# Altium PCB PCB1.PcbDoc (part 2 of 2)
Units mm, origin at the board's own origin, x right, y up, seen from the top; angles counter-clockwise.
Board outline 53.34 x 94.59 mm, 4 copper layers (Top Layer, Signal Layer 1, Signal Layer 2, Bottom Layer), stack 0.778 mm thick; 130 components, 127 nets, 591 pads, 299 vias.
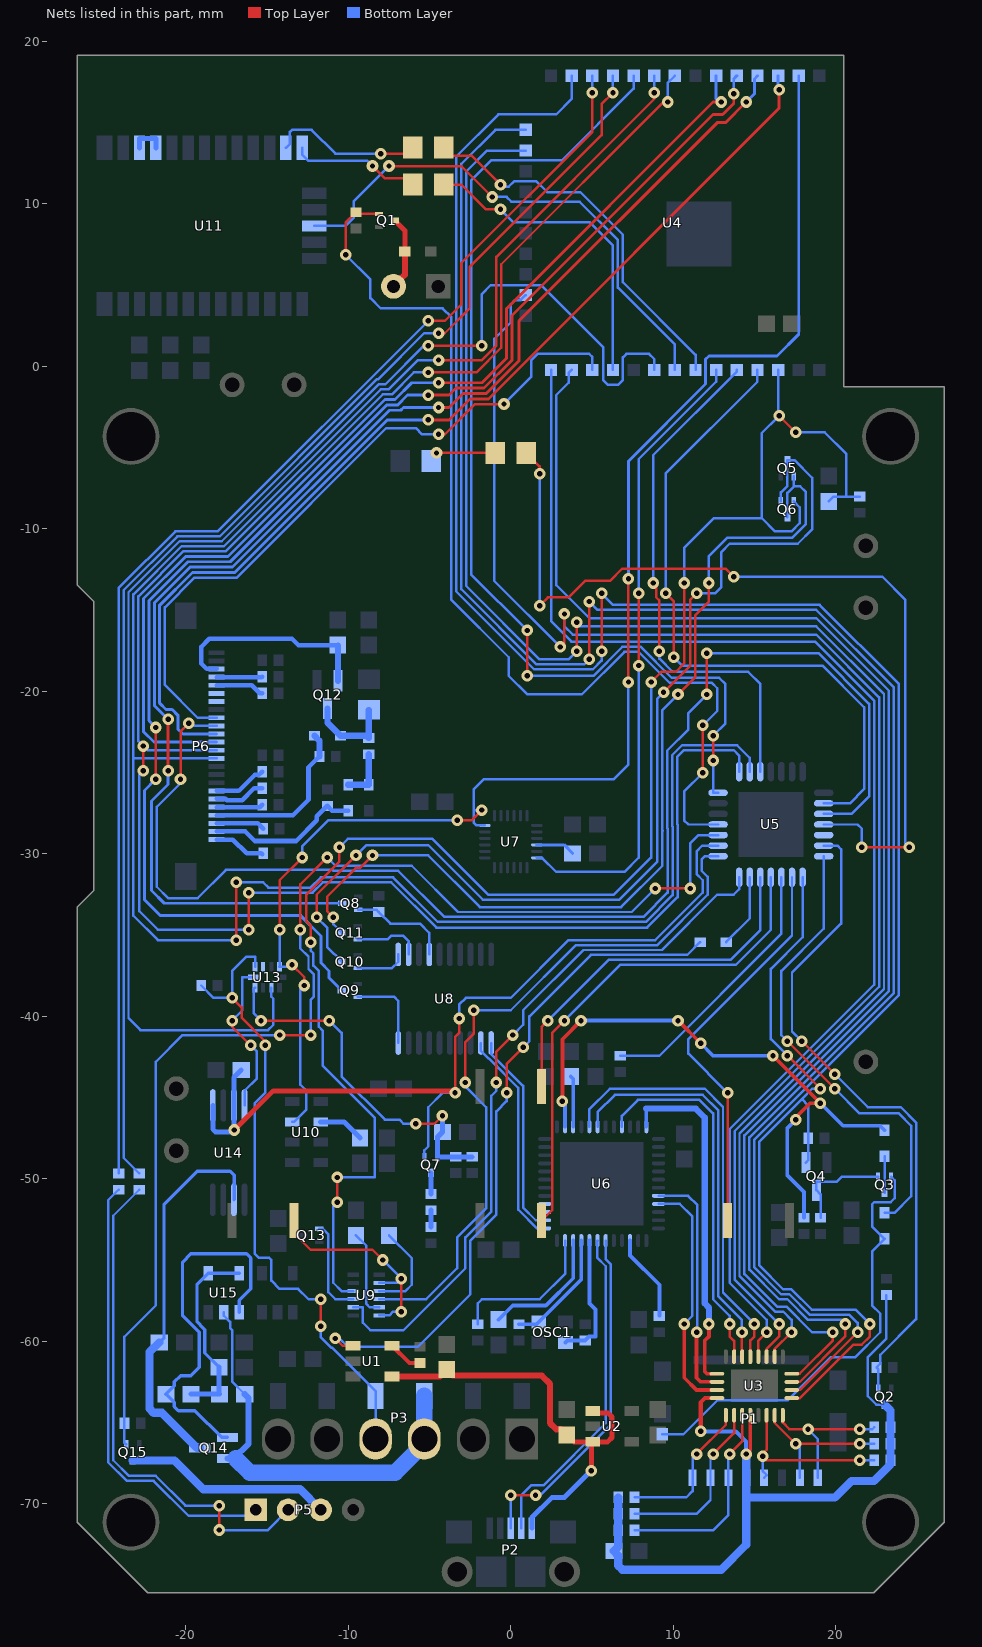
[diagram p4: the nets of this part, all layers, seen from the top]

## Via types
v1: diameter 0.711, hole 0.33, Top Layer to Bottom Layer, tented top, 297 vias
v2: diameter 1.524, hole 0.762, Top Layer to Bottom Layer, tented top, 1 vias
v3: diameter 1, hole 0.5, Top Layer to Bottom Layer, tented top, 1 vias

## Nets (pads, with @x,y where several pads share a name; then routed paths per layer and width w, separated by ;. In a path a pad name is that pad's centre, name@x,y a point inside that pad or via, vN(x,y) a via of type N, cw(c..) or ccw(c..) an arc to the next point about the centre after c; other vN are vias at no path point) (continued)
I2C_SDA: U4.37 U7.24 U10.7 U13.9 | length 94.1
  Top Layer w0.152: v1(-14.224,-34.671) -14.224,-31.623 v1(-12.827,-30.226) ; v1(-13.462,-36.83) -12.7,-37.592 v1(-12.7,-38.1) ; v1(-3.302,-27.94) -2.413,-27.94 v1(-1.778,-27.305) ; v1(7.239,-19.431) v1(7.239,-13.081)
  Bottom Layer w0.152: v1(-14.224,-34.671) -14.224,-36.945 U13.9@-14.236,-36.957 -13.589,-36.957 v1(-13.462,-36.83) ; U10.7@-13.448,-46.492 -13.345,-46.492 -12.573,-45.72 -12.573,-44.577 -12.954,-44.196 -12.954,-38.354 v1(-12.7,-38.1) ; v1(-12.827,-30.226) -12.827,-29.527 -11.24,-27.94 v1(-3.302,-27.94) ; v1(-1.778,-27.305) -2.286,-27.305 ; U7.24@-1.6,-28.25 -2.103,-28.25 -2.286,-28.067 -2.286,-27.305 ; v1(7.239,-19.431) 7.239,-24.511 6.35,-25.4 -1.651,-25.4 -2.286,-26.035 -2.286,-27.305
  Bottom Layer w0.178: v1(7.239,-13.081) 7.239,-5.842 11.988,-1.093 11.988,0.431 12.192,0.635 16.383,0.635 17.716,1.968 U4.37@17.716,17.872
KEEP_ALIVE: U5.1 U9.4 | length 43.7
  Top Layer w0.152: v1(-2.794,-44.069) -2.794,-41.589 -2.286,-41.081 v1(-2.286,-39.624)
  Bottom Layer w0.152: U9.4@-8.09,-57.4 -5.203,-57.4 -3.302,-55.499 -3.302,-53.594 -1.524,-51.816 -1.524,-45.593 -2.794,-44.323 v1(-2.794,-44.069) ; v1(-2.286,-39.624) 0,-39.624 4.013,-35.611 9.016,-35.611 12.116,-32.511 12.116,-31.42 11.735,-31.039 11.735,-30.353 11.944,-30.144 U5.1@12.752,-30.144
MOSI: P6.11 U4.30 U5.9 | length 128.7
  Top Layer w0.152: v1(-16.891,-35.306) v1(-16.891,-31.75) ; v1(-4.445,0.381) -1.778,0.381 -0.889,1.27 -0.889,6.731 8.826,16.446 v1(8.826,16.828)
  Bottom Layer w0.152: P6.11@-18.102,-24.124 -18.108,-24.13 -23.216,-24.13 ; v1(-16.891,-35.306) -21.717,-35.306 -23.216,-33.807 -23.216,-24.13 ; v1(-16.891,-31.75) -15.24,-31.75 -14.91,-32.08 -12.319,-32.08 -11.684,-31.445 -7.24,-31.445 -4.497,-34.188 8.307,-34.188 9.957,-32.538 9.957,-28.322 9.931,-28.297 9.931,-23.928 10.542,-23.317 13.919,-23.317 14.702,-24.1 U5.9@14.702,-24.944 ; v1(-4.445,0.381) -5.715,0.381 -7.518,-1.422 -8.003,-1.422 -17.655,-11.074 -20.256,-11.074 -23.216,-14.034 -23.216,-24.13 ; U4.30@8.826,17.872 v1(8.826,16.828) v1@8.89,16.764
NetC6_1: C6.1 Q6.S R10.2 U4.3 U9.10 | length 104.6
  Top Layer w0.152: v1(-12.319,-35.433) -12.319,-34.417 -12.573,-34.163 -12.573,-32.512 -10.541,-30.48 v1(-10.541,-29.591) ; v1(-10.668,-51.435) v1(-10.668,-49.911) ; v1(8.636,-19.431) 9.271,-18.796 10.16,-18.796 10.668,-18.288 v1(10.668,-13.335) ; v1(16.51,-3.048) v1(17.526,-4.064)
  Bottom Layer w0.152: v1(-12.319,-35.433) -12.319,-35.941 -12.141,-36.119 -12.141,-36.881 -11.811,-37.211 -11.811,-40.64 -11.557,-40.894 -11.557,-43.053 -8.382,-46.228 -8.382,-49.911 v1(-10.668,-49.911) ; v1(-10.668,-51.435) -10.922,-51.689 -10.922,-56.388 -10.41,-56.9 U9.10@-9.69,-56.9 ; v1(-10.541,-29.591) -10.033,-29.083 -4.826,-29.083 -1.397,-32.512 6.35,-32.512 8.636,-30.226 v1(8.636,-19.431) ; v1(10.668,-13.335) 10.668,-11.176 12.497,-9.347 15.443,-9.347 ; U4.3@16.446,-0.228 16.446,-3.112 15.443,-4.115 15.443,-9.347 ; Q6.S@17.418,-8.32 17.78,-8.682 17.78,-9.652 17.272,-10.16 16.256,-10.16 15.443,-9.347 ; v1(17.526,-4.064) 19.304,-4.064 20.648,-5.408 20.648,-8.04 ; C6.1@19.558,-8.315 19.833,-8.04 20.648,-8.04 ; R10.2@21.463,-8.04 20.648,-8.04
NetC9_1: C9.1 P1.4 Q2.D R6.1 R7.1 R8.1 R9.2 R15.1 R16.1 R17.1 U3.2 U3.6 | length 49.3
  Top Layer w0.229: v1(14.478,-66.929) 14.736,-66.671 U3.6@14.736,-64.538
  Top Layer w0.254: v1(11.684,-65.532) 11.684,-63.754 11.95,-63.488 U3.2@12.686,-63.488
  Bottom Layer w0.152: Q2.D@23,-63.89 22.488,-63.89 21.971,-63.373 21.971,-60.96 23.114,-59.817 R9.2@23.114,-57.142
  Bottom Layer w0.254: v1(11.684,-65.532) 13.843,-65.532 14.478,-66.167 v1(14.478,-66.929)
  Bottom Layer w0.508: R17.1@6.612,-69.596 R16.1@6.612,-70.612 R15.1@6.612,-71.628 6.612,-72.623 C9.1@6.337,-72.898 6.604,-73.165 6.604,-73.787 6.858,-74.041 12.954,-74.041 14.487,-72.508 14.487,-69.596 ; v1(14.478,-66.929) 14.487,-66.92 P1.4@14.487,-68.388 14.487,-69.596 ; Q2.D@23,-63.89 23.36,-64.25 R8.1@23.36,-65.278 R7.1@23.36,-66.294 R6.1@23.36,-67.31 23.36,-67.572 22.352,-68.58 20.955,-68.58 19.939,-69.596 14.487,-69.596
NetC11_1: C11.1 U7.10 | length 2.4
  Bottom Layer w0.203: U7.10@1.6,-29.45 3.275,-29.45 C11.1@3.797,-29.972
NetC14_1: C14.1 OSC1.3 U6.44 | length 8
  Bottom Layer w0.229: OSC1.3@3.365,-60.061 3.49,-59.936 C14.1@4.572,-59.936 4.818,-59.69 5.207,-59.69 5.207,-58.039 4.838,-57.67 U6.44@4.838,-53.792
NetC15_1: C15.1 U6.15 | length 3.2
  Bottom Layer w0.229: C15.1@3.683,-43.701 3.838,-43.856 U6.15@3.838,-46.792
NetC17_2: C17.2 OSC1.1 U6.45 | length 7.4
  Bottom Layer w0.229: C17.2@0.508,-58.936 1.59,-58.936 OSC1.1@1.715,-58.811 4.338,-56.188 U6.45@4.338,-53.792
NetC19_1: C19.1 U6.46 | length 8
  Bottom Layer w0.229: C19.1@-0.762,-58.661 0.114,-57.785 2.159,-57.785 3.838,-56.106 U6.46@3.838,-53.792
NetC20_2: C20.2 Q7.S R20.2 R21.2 U13.4 | length 22.6
  Top Layer w0.152: v1(-15.367,-40.259) v1(-11.176,-40.259) ; v1(-5.842,-46.609) -4.699,-46.609 v1(-4.204,-46.114)
  Bottom Layer w0.152: U13.4@-15.736,-38.227 -15.824,-38.315 -15.824,-39.802 v1(-15.367,-40.259) ; v1(-11.176,-40.259) -10.414,-41.021 -10.414,-43.688 -7.747,-46.355 -6.858,-46.355 -6.604,-46.609 v1(-5.842,-46.609)
  Bottom Layer w0.305: v1(-4.204,-46.114) C20.2@-4.204,-47.117 -4.512,-47.425 Q7.S@-4.512,-48.654 -4.502,-48.644 R21.2@-3.388,-48.644 R20.2@-2.372,-48.644
NetC23_2: C23.2 U9.3 | length 5.8
  Bottom Layer w0.152: U9.3@-8.09,-56.9 -6.481,-56.9 -6.096,-56.515 -6.096,-54.877 C23.2@-7.493,-53.48
NetC26_1: C26.1 D8.A L1.2 Q12.D | length 5.5
  Bottom Layer w0.381: Q12.D@-11.277,-21.049 -11.277,-21.939 D8.A@-10.477,-22.739 -8.872,-22.739 C26.1@-8.737,-22.874 L1.2@-8.737,-21.149
NetC26_2: C26.2 D6.A D7.K | length 3.1
  Bottom Layer w0.381: D7.K@-10.007,-25.749 D6.A@-8.737,-25.749 C26.2@-8.737,-23.874
NetC27_1: C27.1 U10.2 | length 2.8
  Bottom Layer w0.305: U10.2@-11.698,-46.492 -10.264,-46.492 C27.1@-9.271,-47.485
NetC28_2: C28.2 U9.5 | length 5.4
  Bottom Layer w0.152: C28.2@-9.525,-53.48 -8.89,-54.115 -8.89,-57.685 -8.675,-57.9 U9.5@-8.09,-57.9
NetC41_1: C41.1 P3.4 Q14.S U15.2 | length 26.1
  Bottom Layer w0.152: U15.2@-17.66,-58.196 -17.66,-58.413 -17.272,-58.801 -17.272,-59.182 -17.152,-59.302 -17.152,-62.464 C41.1@-16.37,-63.246
  Bottom Layer w0.381: Q14.S@-17.438,-67.198 -17.033,-67.198 -16.129,-66.294 -16.129,-63.487 C41.1@-16.37,-63.246
  Bottom Layer w1.016: Q14.S@-16.93,-67.198 -16.056,-68.072 -7.112,-68.072 -5.32,-66.28 P3.4@-5.32,-66.005 P3.4@-5.32,-63.355
NetC41_2: C41.2 R28.2 R30.1 U15.4 U15.5 | length 12
  Bottom Layer w0.203: R28.2@-17.948,-61.584 -18.821,-60.711 -18.821,-59.289 -18.923,-59.187 -18.923,-59.182 -19.304,-58.801 -19.304,-56.49 U15.4@-18.61,-55.796 U15.5@-16.71,-55.796
  Bottom Layer w0.305: R30.1@-19.672,-63.246 C41.2@-17.92,-63.246 -17.948,-63.218 R28.2@-17.948,-61.584
NetC43_2: C43.2 Q7.G U5.2 U14.5 U14.7 | length 54.1
  Top Layer w0.152: v1(-3.429,-44.704) -3.429,-41.275 -3.175,-41.021 v1(-3.175,-40.132)
  Top Layer w0.305: v1(-17.018,-46.99) -14.61,-44.582 -3.551,-44.582 v1(-3.429,-44.704)
  Bottom Layer w0.152: Q7.G@-5.312,-48.654 -5.312,-48.238 -5.08,-48.006 -5.08,-45.593 -4.191,-44.704 v1(-3.429,-44.704) ; v1(-3.175,-40.132) -3.175,-39.277 -2.76,-38.862 0,-38.862 3.556,-35.306 8.89,-35.306 11.811,-32.385 11.811,-31.623 11.43,-31.242 11.43,-29.845 11.781,-29.494 U5.2@12.752,-29.494
  Bottom Layer w0.305: U14.5@-18.333,-45.482 -18.333,-46.945 -18.161,-47.117 -17.145,-47.117 v1(-17.018,-46.99) -17.018,-45.497 U14.7@-17.033,-45.482 -17.033,-43.752 C43.2@-16.583,-43.302
NetD1_A: D1.A P4.2 Q1.D | length 4.6
  Top Layer w0.305: Q1.D@-7.13,8.97 -6.515,8.355 D1.A@-6.515,7.065
  Top Layer w0.381: P4.2@-7.215,4.915 -6.515,5.615 D1.A@-6.515,7.065
NetD2_A: D2.A U5.18 | length 55.9
  Top Layer w0.152: D2.A@0.95,-5.334 1.778,-6.162 v1(1.778,-6.604) ; v1(1.778,-14.732) 2.286,-14.224 3.556,-14.224 4.572,-13.208 6.096,-13.208 6.858,-12.446 13.208,-12.446 v1(13.716,-12.954) ; v1(21.59,-29.591) v1(24.511,-29.591)
  Bottom Layer w0.152: v1(1.778,-14.732) v1(1.778,-6.604) ; v1(13.716,-12.954) 22.86,-12.954 24.257,-14.351 24.257,-29.337 v1(24.511,-29.591) ; U5.18@19.252,-28.194 21.336,-28.194 21.59,-28.448 v1(21.59,-29.591) v1@21.493,-29.494
NetD2_K: D2.K R22.2 | length 3.6
  Top Layer w0.152: v1(-4.572,-5.334) D2.K@-0.95,-5.334
NetD3_A: D3.A U5.21 | length 28.8
  Top Layer w0.152: v1(17.018,-41.529) v1(19.939,-44.45)
  Bottom Layer w0.152: v1(17.018,-41.529) 16.652,-41.163 16.652,-37.196 19.252,-34.596 U5.21@19.252,-30.144 ; v1(19.939,-44.45) 21.463,-45.974 23.876,-45.974 24.638,-46.736 24.638,-51.054 23.6,-52.092 D3.A@22.995,-52.092
NetD4_A: D4.A R13.2 U6.14 | length 37.2
  Top Layer w0.229: v1(3.175,-45.212) 3.175,-41.402 v1(4.318,-40.259) ; v1(10.287,-40.259) v1(11.684,-41.656) ; v1(16.129,-42.418) v1(19.05,-45.339) 18.415,-45.339 17.526,-46.228 v1(17.526,-46.355)
  Bottom Layer w0.229: v1(3.175,-45.212) 3.338,-45.375 U6.14@3.338,-46.792 ; v1(4.318,-40.259) v1(10.287,-40.259) ; v1(11.684,-41.656) 12.446,-42.418 v1(16.129,-42.418) ; v1(17.526,-46.355) 17.018,-46.863 17.018,-49.784 18.042,-50.808 R13.2@18.042,-52.392 ; v1(19.05,-45.339) 20.447,-46.736 22.719,-46.736 D4.A@22.995,-47.012
NetD4_K: D4.K Q3.D | length 2.2
  Bottom Layer w0.152: Q3.D@22.995,-50.842 D4.K@22.995,-48.612
NetD5_A: D5.A U5.27 | length 4.6
  Bottom Layer w0.152: D5.A@13.246,-35.433 14.702,-33.977 U5.27@14.702,-31.444
NetD5_K: D5.K U1.1 | length 42.1
  Top Layer w0.152: v1(-10.795,-59.817) -10.348,-60.264 U1.1@-9.709,-60.264 ; v1(-0.254,-44.704) -0.254,-42.926 v1(0.762,-41.91)
  Bottom Layer w0.152: v1(-10.795,-59.817) -10.541,-59.817 -10.033,-60.325 -5.715,-60.325 -2.489,-57.099 -2.489,-53.797 -0.889,-52.197 -0.889,-45.847 -0.254,-45.212 v1(-0.254,-44.704) ; v1(0.762,-41.91) 1.143,-41.529 1.143,-40.005 4.928,-36.22 10.859,-36.22 D5.K@11.646,-35.433
NetP1_1: P1.1 R17.2 U3.3 | length 9.3
  Top Layer w0.152: v1(11.43,-66.929) 13.236,-65.123 U3.3@13.236,-64.538
  Bottom Layer w0.152: R17.2@7.612,-69.596 10.795,-69.596 11.187,-69.204 P1.1@11.187,-68.388 11.187,-67.172 v1(11.43,-66.929)
NetP1_2: P1.2 R16.2 U3.4 | length 10.8
  Top Layer w0.152: v1(12.446,-66.929) 13.736,-65.639 U3.4@13.736,-64.538
  Bottom Layer w0.152: R16.2@7.612,-70.612 11.43,-70.612 12.287,-69.755 P1.2@12.287,-68.388 12.287,-67.088 v1(12.446,-66.929)
NetP1_3: P1.3 R15.2 U3.5 | length 12.7
  Top Layer w0.152: v1(13.462,-66.929) 14.236,-66.155 U3.5@14.236,-64.538
  Bottom Layer w0.152: R15.2@7.612,-71.628 12.446,-71.628 13.387,-70.687 P1.3@13.387,-68.388 13.387,-67.004 v1(13.462,-66.929)
NetP1_5: P1.5 R6.2 U3.8 | length 11.1
  Top Layer w0.152: U3.8@15.736,-64.538 15.736,-66.663 15.494,-66.905 v1(15.494,-67.056) 15.748,-67.31 v1(21.463,-67.31)
  Bottom Layer w0.152: v1(15.494,-67.056) 15.494,-67.972 15.748,-68.226 P1.5@15.587,-68.388 ; v1(21.463,-67.31) R6.2@22.36,-67.31
NetP1_7: P1.7 R7.2 U3.9 | length 9.3
  Top Layer w0.152: U3.9@16.236,-64.538 16.236,-65.004 v1(17.526,-66.294) v1(21.463,-66.294)
  Bottom Layer w0.152: v1(17.526,-66.294) 17.787,-66.555 P1.7@17.787,-68.388 ; v1(21.463,-66.294) R7.2@22.36,-66.294
NetP1_8: P1.8 R8.2 U3.10 | length 9.5
  Top Layer w0.152: U3.10@16.736,-64.538 16.736,-64.996 17.145,-65.405 v1(18.288,-65.405) v1(21.463,-65.405)
  Bottom Layer w0.152: v1(18.288,-65.405) 18.887,-66.004 P1.8@18.887,-68.388 ; v1(21.463,-65.405) 22.233,-65.405 R8.2@22.36,-65.278
NetP2_2: P2.2 U6.43 | length 20.5
  Bottom Layer w0.152: P2.2@0.65,-71.493 0.65,-69.454 1.27,-68.834 2.032,-68.834 5.842,-65.024 5.842,-55.372 5.334,-54.864 5.334,-53.796 U6.43@5.338,-53.792
NetP2_3: P2.3 U6.42 | length 21.5
  Top Layer w0.152: v1(0,-69.469) v1(1.524,-69.469)
  Bottom Layer w0.152: P2.3@0,-71.493 v1(0,-69.469) ; v1(1.524,-69.469) 1.728,-69.469 1.778,-69.519 6.147,-65.15 6.147,-55.246 5.838,-54.937 U6.42@5.838,-53.792
NetP3_3: P3.3 R29.1 U13.6 | length 39.1
  Top Layer w0.152: v1(-17.145,-38.862) -16.561,-39.446 -16.561,-40.081 -15.113,-41.529 v1(-15.113,-41.783) ; v1(-11.684,-59.055) v1(-11.684,-57.404)
  Bottom Layer w0.152: R29.1@-19.042,-38.1 -18.28,-38.862 v1(-17.145,-38.862) -17.145,-37.211 -16.256,-36.322 -15.748,-36.322 -15.736,-36.334 U13.6@-15.736,-36.957 ; v1(-15.113,-41.783) -15.113,-44.704 -15.748,-45.339 -15.748,-54.61 -15.494,-54.864 -14.859,-54.864 -14.732,-54.991 -14.732,-56.261 -14.224,-56.769 -13.081,-56.769 -12.446,-57.404 v1(-11.684,-57.404) ; v1(-11.684,-59.055) -11.684,-59.754 -11.037,-60.401 -10.973,-60.401 -8.32,-63.054 P3.3@-8.32,-63.355 P3.3@-8.32,-66.005
NetP5_1: P5.1 R34.1 | length 27.6
  Bottom Layer w0.152: R34.1@-24.13,-50.665 -24.765,-51.3 -24.765,-67.437 -23.622,-68.58 -21.971,-68.58 -19.812,-70.739 -16.081,-70.739 P5.1@-15.7,-70.358
NetP5_2: P5.2 R32.1 | length 31.2
  Top Layer w0.152: v1(-17.932,-71.603) v1(-17.932,-70.104)
  Bottom Layer w0.152: R32.1@-22.86,-50.665 -24.46,-52.265 -24.46,-67.31 -23.495,-68.275 -21.845,-68.275 -20.016,-70.104 v1(-17.932,-70.104) ; v1(-17.932,-71.603) -14.945,-71.603 P5.2@-13.7,-70.358
NetP5_3: P5.3 Q15.D | length 12.8
  Bottom Layer w0.508: Q15.D@-23.271,-67.318 -20.693,-67.318 -18.923,-69.088 -12.97,-69.088 P5.3@-11.7,-70.358
NetP6_13: P6.13 U4.33 | length 64.8
  Top Layer w0.178: v1(-4.445,-1.016) -1.778,-1.016 -0.254,0.508 -0.254,3.556 12.446,16.256 v1(12.954,16.256)
  Bottom Layer w0.178: P6.13@-18.102,-23.124 -21.961,-23.124 -22.593,-22.492 -22.593,-14.292 -19.998,-11.697 -17.397,-11.697 -7.745,-2.045 -7.125,-2.045 -6.096,-1.016 v1(-4.445,-1.016) ; U4.33@12.636,17.872 12.636,16.446 12.826,16.256 v1(12.954,16.256)
NetP6_14: P6.14 U4.36 | length 63.6
  Top Layer w0.178: v1(-5.08,-3.302) -3.81,-3.302 -2.515,-2.007 -1.368,-2.007 16.51,15.871 v1(16.51,17.018)
  Bottom Layer w0.178: P6.14@-18.102,-22.624 -20.175,-22.624 -20.485,-22.314 -20.485,-21.47 -20.835,-21.12 -21.212,-21.12 -21.603,-20.729 -21.603,-14.702 -19.588,-12.687 -16.987,-12.687 -7.602,-3.302 v1(-5.08,-3.302) ; U4.36@16.446,17.872 16.446,17.082 v1(16.51,17.018)
NetP6_15: P6.15 U5.17 | length 82.9
  Top Layer w0.152: v1(-20.32,-25.4) -20.32,-22.479 v1(-19.812,-21.971) ; v1(12.065,-20.193) v1(12.065,-17.653)
  Bottom Layer w0.152: v1(-20.32,-25.4) -20.32,-25.654 -21.781,-27.114 -21.781,-32.023 -21.082,-32.721 -19.259,-32.721 -17.526,-30.988 -10.972,-30.988 -10.921,-31.039 -6.934,-31.039 -4.089,-33.884 8.153,-33.884 9.652,-32.385 9.652,-28.449 9.627,-28.423 9.627,-23.647 10.922,-22.352 10.922,-21.336 v1(12.065,-20.193) ; v1(-19.812,-21.971) -19.659,-22.124 P6.15@-18.102,-22.124 ; v1(12.065,-17.653) 18.923,-17.653 22.047,-20.777 22.047,-26.467 20.97,-27.544 U5.17@19.252,-27.544
NetP6_16: P6.16 U4.12 | length 43.3
  Top Layer w0.152: v1(-4.445,-4.191) -4.064,-4.191 -2.197,-2.324 v1(-0.419,-2.324)
  Bottom Layer w0.152: P6.16@-18.102,-21.624 -19.27,-21.624 -21.285,-19.609 -21.285,-14.834 -19.456,-13.005 -16.856,-13.005 -7.661,-3.81 -5.842,-3.81 -5.461,-4.191 v1(-4.445,-4.191) ; v1(-0.419,-2.324) 1.27,-0.635 1.27,0.381 1.651,0.762 4.826,0.762 5.016,0.572 U4.12@5.016,-0.228
NetQ1_G: Q1.G R1.1 U5.4 | length 63.1
  Top Layer w0.152: v1(-10.16,6.858) -10.16,8.835 R1.1@-9.525,9.47 -9.425,9.37 Q1.G@-8.11,9.37 ; v1(11.811,-25.019) v1(11.811,-22.098)
  Bottom Layer w0.152: v1(-10.16,6.858) -8.636,5.334 -8.636,4.191 -8.001,3.556 -4.191,3.556 -3.658,3.023 -3.658,-14.376 -0.127,-17.907 -0.127,-19.05 1.016,-20.193 4.368,-20.193 6.984,-17.577 7.875,-17.577 9.78,-19.482 12.37,-19.482 12.7,-19.812 12.7,-21.209 v1(11.811,-22.098) ; v1(11.811,-25.019) 10.668,-26.162 10.668,-27.94 10.922,-28.194 U5.4@12.752,-28.194
NetQ2_G: Q2.G R5.2 U5.20 | length 41
  Top Layer w0.152: v1(17.907,-41.529) v1(19.939,-43.561)
  Bottom Layer w0.152: v1(17.907,-41.529) 17.302,-40.924 17.302,-37.308 20.32,-34.29 20.32,-29.718 20.096,-29.494 U5.20@19.252,-29.494 ; v1(19.939,-43.561) 21.971,-45.593 24.003,-45.593 24.943,-46.533 24.943,-58.623 22.733,-60.833 22.733,-61.367 R5.2@22.5,-61.6 22.6,-61.7 Q2.G@22.6,-62.91
NetQ3_G: Q3.G Q4.D R12.2 | length 6.2
  Bottom Layer w0.152: R12.2@19.058,-52.392 19.058,-50.948 Q4.D@18.804,-50.694 18.804,-50.165 20.066,-50.165 20.369,-49.862 Q3.G@22.595,-49.862
NetQ4_G: Q4.G R11.2 U3.11 U5.22 | length 47.4
  Top Layer w0.152: v1(17.018,-42.418) v1(19.05,-44.45) ; U3.11@17.286,-63.488 17.792,-63.488 21.082,-60.198 21.59,-60.198 22.098,-59.69 v1(22.098,-58.928)
  Bottom Layer w0.152: v1(17.018,-42.418) 16.002,-41.402 16.002,-37.084 17.952,-35.134 U5.22@17.952,-31.444 ; Q4.G@18.154,-48.994 18.296,-48.852 R11.2@18.296,-47.498 18.296,-45.474 17.907,-45.085 ; v1(19.05,-44.45) 18.542,-44.45 17.907,-45.085 ; v1(22.098,-58.928) 21.209,-58.039 18.515,-58.039 17.271,-56.794 16.763,-56.794 15.291,-55.323 15.291,-47.701 17.907,-45.085
NetQ5_D: Q5.D Q6.G Q10.D | length 64.7
  Top Layer w0.152: v1(-11.938,-33.909) -11.938,-32.512 v1(-9.525,-30.099) ; v1(9.398,-20.066) 11.049,-18.415 11.049,-14.351 v1(11.43,-13.97)
  Bottom Layer w0.152: v1(-11.938,-33.909) -11.303,-34.544 -11.303,-35.72 Q10.D@-10.396,-36.627 ; v1(-9.525,-30.099) -8.89,-29.464 -5.08,-29.464 -1.727,-32.817 6.68,-32.817 9.017,-30.48 9.017,-20.447 v1(9.398,-20.066) ; v1(11.43,-13.97) 12.573,-13.97 12.954,-13.589 12.954,-11.43 13.462,-10.922 17.653,-10.922 18.542,-10.033 18.542,-6.858 17.464,-5.78 Q5.D@17.018,-5.78 17.018,-7.366 16.618,-7.766 Q6.G@16.618,-8.32
NetQ5_G: Q5.G Q6.D Q11.D | length 59.2
  Top Layer w0.152: v1(-10.922,-33.909) -11.303,-33.528 -11.303,-32.639 -9.525,-30.861 -9.271,-30.861 v1(-8.509,-30.099) ; v1(10.287,-20.193) 11.354,-19.126 11.354,-15.316 12.192,-14.478 v1(12.192,-13.335)
  Bottom Layer w0.152: v1(-10.922,-33.909) -10.922,-34.323 Q11.D@-10.396,-34.849 ; v1(-8.509,-30.099) -5.08,-30.099 -1.905,-33.274 6.782,-33.274 9.322,-30.734 9.322,-28.6 ; 9.347,-28.575 9.322,-28.6 ; v1(10.287,-20.193) 9.322,-21.158 9.322,-28.6 ; v1(12.192,-13.335) 12.192,-11.684 13.335,-10.541 17.322,-10.541 18.161,-9.702 18.161,-7.747 17.811,-7.397 17.418,-7.397 ; Q6.D@17.018,-9.3 17.018,-7.797 17.418,-7.397 ; Q5.G@17.418,-6.76 17.418,-7.397
NetQ7_D: Q7.D R24.1 | length 1.3
  Bottom Layer w0.305: R24.1@-4.912,-50.922 Q7.D@-4.912,-49.634
NetQ8_D: Q8.D U4.35 | length 83
  Top Layer w0.178: v1(-21.082,-24.892) v1(-21.082,-21.717) ; v1(-4.445,-2.54) -3.81,-2.54 -2.946,-1.676 -1.504,-1.676 0.508,0.336 0.508,2.794 12.7,14.986 13.208,14.986 v1(14.478,16.256)
  Bottom Layer w0.178: v1(-21.082,-24.892) -21.082,-25.73 -22.098,-26.746 -22.098,-32.258 -21.317,-33.039 Q8.D@-10.378,-33.039 ; v1(-21.082,-21.717) -21.933,-20.866 -21.933,-14.566 -19.724,-12.357 -17.124,-12.357 -7.472,-2.705 -6.769,-2.705 -6.604,-2.54 v1(-4.445,-2.54) ; v1(14.478,16.256) 14.986,16.764 14.986,17.682 U4.35@15.176,17.872
NetQ8_S: Q8.S R25.2 U8.4 | length 6.3
  Bottom Layer w0.152: Q8.S@-9.398,-33.439 -8.26,-33.439 R25.2@-8.128,-33.571 -7.409,-34.29 -5.588,-34.29 -5.016,-34.861 U8.4@-5.016,-36.188
NetQ9_D: Q9.D U4.34 | length 86.6
  Top Layer w0.178: v1(-21.844,-25.4) v1(-21.844,-22.225) ; v1(-5.08,-1.778) -3.81,-1.778 -3.378,-1.346 -1.641,-1.346 0.076,0.371 0.076,3.124 12.446,15.494 13.036,15.494 13.716,16.174 v1(13.716,16.764)
  Bottom Layer w0.178: v1(-21.844,-25.4) -22.543,-26.098 -22.543,-32.829 -21.59,-33.782 -12.954,-33.782 -11.684,-35.052 -11.684,-36.703 -11.176,-37.211 -11.176,-37.625 Q9.D@-10.396,-38.405 ; v1(-21.844,-22.225) -22.263,-21.806 -22.263,-14.429 -19.861,-12.027 -17.261,-12.027 -7.609,-2.375 -6.947,-2.375 -6.35,-1.778 v1(-5.08,-1.778) ; v1(13.716,16.764) 13.716,17.682 U4.34@13.906,17.872
NetQ9_S: Q9.S U8.20 | length 5.2
  Bottom Layer w0.152: Q9.S@-9.416,-38.805 -9.397,-38.786 -7.188,-38.786 -6.921,-39.052 U8.20@-6.921,-41.638
NetQ10_S: Q10.S U8.1 | length 3.1
  Bottom Layer w0.152: Q10.S@-9.416,-37.027 -7.309,-37.027 -6.921,-36.639 U8.1@-6.921,-36.188
NetQ11_S: Q11.S U8.2 | length 4.2
  Bottom Layer w0.152: Q11.S@-9.416,-35.249 -7.563,-35.249 -7.366,-35.052 -6.604,-35.052 -6.286,-35.369 U8.2@-6.286,-36.188
NetQ13_G: Q13.G U9.9 | length 6
  Bottom Layer w0.152: Q13.G@-11.788,-53.062 -11.581,-53.062 -11.227,-53.416 -11.227,-56.972 -10.799,-57.4 U9.9@-9.69,-57.4
NetQ14_D: Q14.D R31.1 U14.2 | length 23.8
  Bottom Layer w0.203: R31.1@-21.629,-60.06 -21.336,-59.767 -21.336,-51.562 -19.304,-49.53 -17.272,-49.53 -17.018,-49.784 -17.018,-51.267 U14.2@-17.033,-51.282
  Bottom Layer w0.508: R31.1@-21.629,-60.06 -22.225,-60.656 -22.225,-64.135 -21.971,-64.389 -21.463,-64.389 -19.304,-66.548 Q14.D@-19.138,-66.548
NetQ14_G: Q14.G R30.2 U15.1 | length 22.9
  Bottom Layer w0.203: Q14.G@-17.438,-65.898 -17.795,-65.898 -19.431,-64.262 -20.447,-64.262 -20.701,-64.008 -20.701,-63.754 -21.209,-63.246 R30.2@-21.222,-63.246 -20.701,-62.725 -20.701,-62.484 -20.32,-62.103 -19.685,-62.103 -19.177,-61.595 -19.177,-59.436 -20.193,-58.42 -20.193,-55.118 -19.685,-54.61 -16.256,-54.61 -16.002,-54.864 -16.002,-56.769 -16.71,-57.477 U15.1@-16.71,-58.196
NetQ15_G: Q15.G R33.1 U5.3 | length 75.7
  Top Layer w0.152: v1(-14.224,-41.148) v1(-12.319,-41.148) ; v1(-12.954,-34.671) -12.954,-31.877 v1(-11.303,-30.226) ; v1(8.89,-32.131) v1(11.049,-32.131)
  Bottom Layer w0.152: Q15.G@-23.671,-66.338 -23.771,-66.238 R33.1@-23.771,-65.028 -23.771,-59.712 -21.844,-57.785 -21.844,-42.799 -20.193,-41.148 v1(-14.224,-41.148) ; v1(-12.954,-34.671) -12.954,-35.814 -12.446,-36.322 -12.446,-37.084 -12.116,-37.414 -12.116,-38.786 -12.319,-38.989 v1(-12.319,-41.148) ; v1(-11.303,-30.226) -10.795,-30.734 -6.096,-30.734 -3.251,-33.579 7.442,-33.579 v1(8.89,-32.131) ; v1(11.049,-32.131) 11.049,-29.337 11.542,-28.844 U5.3@12.752,-28.844
NetR2_1: R2.1 U4.11 | length 19.6
  Top Layer w0.152: R2.1@-4.13,11.176 -3.048,11.176 -1.524,9.652 v1(-0.635,9.652)
  Bottom Layer w0.152: v1(-0.635,9.652) 0.165,8.852 4.864,8.852 6.286,7.43 U4.11@6.286,-0.228
NetR2_2: R2.2 U11.26 | length 8
  Top Layer w0.152: v1(-8.509,12.319) -7.747,11.557 -6.411,11.557 R2.2@-6.03,11.176
  Bottom Layer w0.152: U11.26@-12.842,13.432 -12.842,13.033 -12.446,12.637 -8.827,12.637 v1(-8.509,12.319)
NetR3_1: R3.1 U4.7 | length 23.8
  Top Layer w0.152: R3.1@-4.13,13.462 -3.622,12.954 -2.413,12.954 v1(-0.635,11.176)
  Bottom Layer w0.152: v1@-0.687,11.049 -0.127,11.049 0.216,11.392 1.562,11.392 2.244,10.71 4.276,10.71 6.896,8.09 6.896,5.169 11.366,0.699 U4.7@11.366,-0.228 ; v1@-0.635,11.101 v1(-0.635,11.176)
NetR3_2: R3.2 U11.25 | length 9.5
  Top Layer w0.152: v1(-8.001,13.081) -6.411,13.081 R3.2@-6.03,13.462
  Bottom Layer w0.152: U11.25@-13.842,13.432 -13.589,13.685 -13.589,14.415 -13.462,14.542 -12.256,14.542 -10.795,13.081 v1(-8.001,13.081)
NetR4_1: R4.1 U1.5 | length 2.2
  Top Layer w0.254: U1.5@-7.309,-60.264 -6.24,-61.333 R4.1@-5.588,-61.333
NetR14_2: R14.2 U6.39 | length 5.4
  Bottom Layer w0.229: U6.39@7.338,-53.792 7.338,-54.709 9.144,-56.515 R14.2@9.144,-58.428
NetR18_1: R18.1 U5.24 | length 16.5
  Bottom Layer w0.152: R18.1@6.731,-42.426 9.136,-42.426 16.652,-34.91 U5.24@16.652,-31.444
NetR19_1: R19.1 U6.47 | length 9.5
  Bottom Layer w0.152: R19.1@-2.032,-58.936 -2.032,-57.658 -1.778,-57.404 1.778,-57.404 3.338,-55.844 U6.47@3.338,-53.792
NetR23_1: R23.1 R24.2 | length 1
  Bottom Layer w0.305: R23.1@-4.912,-52.954 R24.2@-4.912,-51.922
NetR32_2: R32.2 U4.28 | length 82.7
  Top Layer w0.152: v1(-4.445,2.032) -4.064,2.032 -2.54,3.556 -2.54,6.096 5.588,14.224 5.588,16.13 v1(6.286,16.828)
  Bottom Layer w0.152: R32.2@-22.86,-49.665 -23.825,-48.7 -23.825,-13.782 -20.508,-10.465 -17.908,-10.465 -8.256,-0.813 -8.179,-0.813 -5.334,2.032 v1(-4.445,2.032) ; v1(6.286,16.828) U4.28@6.286,17.872
NetR34_2: R34.2 U4.27 | length 81.7
  Top Layer w0.152: v1(-5.08,2.794) -4.064,2.794 -3.048,3.81 -3.048,6.35 5.016,14.414 v1(5.016,16.828)
  Bottom Layer w0.152: R34.2@-24.13,-49.665 -24.13,-13.656 -20.634,-10.16 -18.034,-10.16 v1(-5.08,2.794) ; v1(5.016,16.828) U4.27@5.016,17.872
NetSW1_2: SW1.2 U9.2 U9.6 | length 13.5
  Top Layer w0.152: SW1.2@-13.34,-52.57 -13.34,-53.335 -12.319,-54.356 -8.509,-54.356 v1(-7.874,-54.991) ; v1(-6.731,-58.166) v1(-6.731,-56.134)
  Bottom Layer w0.152: U9.6@-8.09,-58.4 -7.473,-58.4 -7.239,-58.166 v1(-6.731,-58.166) ; U9.2@-8.09,-56.4 -6.997,-56.4 v1(-6.731,-56.134) v1(-7.874,-54.991)
NetSW2_1: SW2.1 U5.25 | length 31.1
  Top Layer w0.152: SW2.1@1.9,-52.57 2.54,-51.93 2.54,-41.021 v1(3.302,-40.259)
  Bottom Layer w0.152: v1(3.302,-40.259) 6.731,-36.83 13.843,-36.83 16.002,-34.671 U5.25@16.002,-31.444
NetSW3_1: SW3.1 U5.26 | length 22.8
  Top Layer w0.152: SW3.1@1.9,-44.323 1.9,-40.645 v1(2.286,-40.259)
  Bottom Layer w0.152: v1(2.286,-40.259) 6.02,-36.525 13.513,-36.525 15.352,-34.686 U5.26@15.352,-31.444
NetSW4_1: SW4.1 U5.23 | length 24.8
  Top Layer w0.152: SW4.1@13.34,-52.57 v1(13.34,-44.709)
  Bottom Layer w0.152: v1(13.34,-44.709) 10.922,-42.291 10.922,-41.402 17.302,-35.022 U5.23@17.302,-31.444
NetU3_1: U3.1 U6.33 | length 14.9
  Top Layer w0.229: v1(10.668,-58.928) 10.668,-62.23 11.426,-62.988 U3.1@12.686,-62.988
  Bottom Layer w0.152: U6.33@9.088,-51.542 10.394,-51.542 11.176,-52.324 11.176,-58.42 v1(10.668,-58.928)
NetU3_12: U3.12 U4.26 | length 126.1
  Top Layer w0.152: v1(5.588,-17.526) v1(5.588,-13.97) ; U3.12@17.286,-62.988 17.784,-62.988 v1(21.336,-59.436)
  Bottom Layer w0.152: U4.26@3.746,17.872 3.746,16.446 2.794,15.494 -0.762,15.494 -3.353,12.903 -3.353,-13.855 1.436,-18.644 5.055,-18.644 5.588,-18.111 v1(5.588,-17.526) ; v1(5.588,-13.97) 6.299,-14.681 18.999,-14.681 23.876,-19.558 23.876,-38.685 14.986,-47.575 14.986,-55.449 16.636,-57.099 17.144,-57.099 18.414,-58.369 19.558,-58.369 19.583,-58.344 20.816,-58.344 21.336,-58.864 v1(21.336,-59.436)
NetU3_13: U3.13 U4.24 | length 117.4
  Top Layer w0.152: v1(4.826,-18.034) v1(4.826,-14.478) ; U3.13@17.286,-62.488 17.776,-62.488 20.574,-59.69 v1(20.574,-58.928)
  Bottom Layer w0.152: U4.24@0.916,14.542 -0.952,14.542 -3.048,12.446 -3.048,-13.716 1.575,-18.339 4.521,-18.339 v1(4.826,-18.034) ; v1(4.826,-14.478) 5.334,-14.986 18.796,-14.986 23.571,-19.761 23.571,-38.559 14.681,-47.449 14.681,-55.575 16.51,-57.404 17.018,-57.404 18.288,-58.674 20.32,-58.674 v1(20.574,-58.928)
NetU3_14: U3.14 U4.13 | length 87.2
  Top Layer w0.152: U3.14@17.286,-61.988 17.768,-61.988 19.812,-59.944 v1(19.812,-59.436)
  Bottom Layer w0.152: U4.13@3.746,-0.228 3.556,-0.418 3.556,-1.016 2.794,-1.778 2.794,-13.462 4.826,-15.494 18.796,-15.494 23.266,-19.964 23.266,-38.432 14.376,-47.322 14.376,-55.855 16.382,-57.861 16.967,-57.861 18.542,-59.436 v1(19.812,-59.436)
NetU3_16: U3.16 U4.23 | length 107.8
  Top Layer w0.152: v1(4.064,-17.526) 3.81,-17.526 4.064,-17.272 v1(4.064,-15.748) ; U3.16@16.236,-60.938 16.236,-60.472 v1(17.272,-59.436)
  Bottom Layer w0.152: U4.23@0.916,13.272 -1.46,13.272 -2.743,11.989 -2.743,-13.513 1.778,-18.034 3.556,-18.034 v1(4.064,-17.526) ; v1@4.064,-16.002 18.796,-16.002 22.962,-20.168 22.962,-38.306 14.072,-47.196 14.072,-55.982 16.256,-58.166 16.764,-58.166 17.272,-58.674 v1(17.272,-59.436)
NetU3_17: U3.17 U4.16 | length 94.1
  Top Layer w0.152: v1(3.048,-17.272) 3.302,-17.018 v1(3.302,-15.24) ; U3.17@15.736,-60.938 15.736,-60.464 16.51,-59.69 v1(16.51,-58.928)
  Bottom Layer w0.152: U4.16@0.916,4.382 0.598,4.064 0.254,4.064 0,3.81 0,2.694 -1.016,1.678 -1.016,-13.208 v1(3.048,-17.272) ; v1(3.302,-15.24) 3.302,-16.002 3.81,-16.51 18.796,-16.51 22.657,-20.371 22.657,-38.18 13.767,-47.07 13.767,-56.185 v1(16.51,-58.928)
NetU3_18: U3.18 U4.14 | length 82.6
  Top Layer w0.152: U3.18@15.236,-60.938 15.236,-59.948 v1(15.748,-59.436)
  Bottom Layer w0.152: U4.14@2.476,-0.228 2.476,-15.684 3.734,-16.942 18.72,-16.942 22.352,-20.574 22.352,-38.054 13.462,-46.944 13.462,-56.388 15.748,-58.674 v1(15.748,-59.436)
NetU3_19: U3.19 U6.17 | length 26.6
  Top Layer w0.152: U3.19@14.736,-60.938 14.736,-59.94 14.986,-59.69 v1(14.986,-58.928)
  Bottom Layer w0.152: U6.17@4.838,-46.792 4.838,-45.708 6.096,-44.45 11.938,-44.45 13.056,-45.568 13.056,-56.998 v1(14.986,-58.928)
NetU3_20: U3.20 U6.18 | length 24.9
  Top Layer w0.152: v1(14.224,-59.436) 14.224,-60.926 U3.20@14.236,-60.938
  Bottom Layer w0.152: U6.18@5.338,-46.792 5.338,-45.893 6.401,-44.83 11.81,-44.83 12.751,-45.771 12.751,-57.201 14.224,-58.674 v1(14.224,-59.436)
NetU3_21: U3.21 U6.21 | length 22.5
  Top Layer w0.152: v1(13.462,-58.928) 13.462,-59.69 13.736,-59.964 U3.21@13.736,-60.938
  Bottom Layer w0.152: U6.21@6.838,-46.792 6.838,-46.121 7.824,-45.135 11.607,-45.135 12.446,-45.974 12.446,-57.404 13.462,-58.42 v1(13.462,-58.928)
NetU3_23: U3.23 U6.24 | length 21.6
  Top Layer w0.229: v1(12.192,-58.928) 12.192,-59.69 11.938,-59.944 11.938,-61.849 12.077,-61.988 U3.23@12.686,-61.988
  Bottom Layer w0.229: U6.24@8.338,-46.792 8.338,-45.676
  Bottom Layer w0.381: 8.338,-45.676 11.386,-45.676 11.938,-46.228 11.938,-57.658 12.192,-57.912 v1(12.192,-58.928)
NetU3_24: U3.24 U6.32 | length 14.6
  Top Layer w0.229: v1(11.43,-59.436) 11.43,-62.23 11.688,-62.488 U3.24@12.686,-62.488
  Bottom Layer w0.152: U6.32@9.088,-51.042 10.91,-51.042 11.481,-51.613 11.481,-59.385 v1(11.43,-59.436)
NetU4_4: U4.4 U5.16 | length 41.1
  Top Layer w0.152: v1(9.525,-13.97) 10.033,-14.478 v1(10.033,-17.907)
  Bottom Layer w0.152: v1(9.525,-13.97) 9.525,-6.604 15.176,-0.953 U4.4@15.176,-0.228 ; v1(10.033,-17.907) 10.541,-18.415 19.177,-18.415 21.742,-20.98 21.742,-26.01 20.858,-26.894 U5.16@19.252,-26.894
NetU4_5: U4.5 U5.10 | length 32.3
  Top Layer w0.152: v1(8.763,-13.335) 8.941,-13.513 8.941,-14.212 9.144,-14.415 v1(9.144,-17.526)
  Bottom Layer w0.152: v1(8.763,-13.335) 8.763,-5.461 13.906,-0.318 U4.5@13.906,-0.228 ; v1(9.144,-17.526) 9.144,-17.984 9.956,-18.796 14.605,-18.796 15.352,-19.543 U5.10@15.352,-24.944
NetU4_6: U4.6 U7.12 | length 39
  Top Layer w0.152: v1(7.874,-18.415) v1(7.874,-13.97)
  Bottom Layer w0.152: U7.12@1.6,-30.25 1.929,-30.25 2.794,-31.115 6.985,-31.115 7.874,-30.226 v1(7.874,-18.415) ; v1(7.874,-13.97) 7.874,-5.715 12.636,-0.953 U4.6@12.636,-0.228
NetU4_8: U4.8 U11.29 | length 32.1
  Top Layer w0.152: v1(-7.493,12.319) -3.048,12.319 v1(-1.143,10.414)
  Bottom Layer w0.152: U11.29@-12.092,8.632 -10.164,8.632 -9.652,9.144 -9.652,10.16 v1(-7.493,12.319) ; v1(-1.143,10.414) -0.254,10.414 0.038,10.122 4.229,10.122 6.591,7.76 6.591,4.839 10.096,1.334 U4.8@10.096,-0.228
NetU4_9: U4.9 U13.2 | length 86.1
  Top Layer w0.152: v1(-5.08,1.27) v1(-1.778,1.27)
  Bottom Layer w0.152: U13.2@-14.736,-38.227 -14.736,-38.784 -14.607,-38.913 -14.607,-40.515 -14.935,-40.843 -22.784,-40.843 -23.52,-40.107 -23.52,-13.908 -20.382,-10.77 -17.781,-10.77 -8.129,-1.118 -7.722,-1.118 -5.334,1.27 v1(-5.08,1.27) ; v1(-1.778,1.27) -1.778,4.445 -1.231,4.992 1.866,4.992 5.676,1.182 5.676,-0.85 5.969,-1.143 6.604,-1.143 6.896,-0.851 6.896,0.546 7.112,0.762 8.509,0.762 8.826,0.445 U4.9@8.826,-0.228
NetU4_29: U4.29 U5.7 | length 66.2
  Top Layer w0.152: v1(1.016,-19.05) v1(1.016,-16.256) ; v1(12.446,-24.257) v1(12.446,-22.733)
  Bottom Layer w0.152: v1(1.016,-19.05) 5.08,-19.05 6.858,-17.272 8.001,-17.272 9.906,-19.177 12.827,-19.177 13.208,-19.558 13.208,-21.971 v1(12.446,-22.733) ; v1(1.016,-16.256) -2.438,-12.802 -2.438,11.43 -1.206,12.662 3.137,12.662 7.556,17.081 U4.29@7.556,17.872 ; v1(12.446,-24.257) 12.446,-26.244 U5.7@12.752,-26.244
NetU5_19: U5.19
NetU5_28: U5.28 U9.8 | length 44.1
  Top Layer w0.152: v1(-0.889,-44.069) -0.889,-42.164 v1(0.127,-41.148)
  Bottom Layer w0.152: U9.8@-9.69,-57.9 -9.106,-57.9 -9.106,-58.839 -8.636,-59.309 -6.604,-59.309 -2.794,-55.499 -2.794,-53.594 -1.194,-51.994 -1.194,-44.882 -0.889,-44.577 v1(-0.889,-44.069) ; v1(0.127,-41.148) 0.762,-40.513 0.762,-39.624 4.47,-35.916 9.296,-35.916 12.7,-32.512 13.716,-32.512 14.052,-32.176 U5.28@14.052,-31.444
NetU6_1: U6.1 U8.12 | length 13.3
  Bottom Layer w0.152: U8.12@-1.841,-41.638 -1.841,-42.124 -1.374,-42.591 -1.351,-42.591 0.457,-44.399 0.457,-51.892 1.607,-53.042 U6.1@2.088,-53.042
NetU6_2: U6.2 U8.11 | length 12.6
  Bottom Layer w0.152: U8.11@-1.206,-41.638 -1.206,-42.304 0.762,-44.273 0.762,-51.766 1.538,-52.542 U6.2@2.088,-52.542
NetU6_3: U6.3
NetU6_4: U6.4
NetU11_16: U11.16 U11.17 | length 2.2
  Bottom Layer w0.305: U11.16@-22.842,13.432 -22.842,14.016 -21.842,14.016 U11.17@-21.842,13.432
NetU13_5: U13.5 U14.8 | length 9.8
  Top Layer w0.152: v1(-17.145,-40.259) -17.145,-40.64 v1(-16.002,-41.783)
  Bottom Layer w0.152: v1(-17.145,-40.259) -16.51,-39.624 -16.51,-37.592 U13.5@-15.846,-37.592 ; U14.8@-16.383,-45.482 -16.383,-44.577 -15.621,-43.815 -15.621,-42.164 v1(-16.002,-41.783)
NetU13_7: U13.7
PREVGH: C29.2 D8.K P6.4 | length 10.4
  Bottom Layer w0.279: P6.4@-18.102,-27.624 -13.4,-27.624 -12.446,-26.67 -12.446,-24.678 C29.2@-11.777,-24.009
  Bottom Layer w0.381: D8.K@-12.077,-22.739 -11.777,-23.039 C29.2@-11.777,-24.009
PREVGL: C30.2 D7.A P6.2 | length 9.5
  Bottom Layer w0.279: P6.2@-18.102,-28.624 -16.334,-28.624 -15.748,-29.21 -13.208,-29.21 -11.938,-27.94 -11.938,-27.686 C30.2@-11.301,-27.049 ; C30.2@-11.277,-27.049 C30.2@-11.301,-27.049 ; D7.A@-10.007,-27.349 -11.001,-27.349 C30.2@-11.301,-27.049
RESE: P6.22 Q12.S R26.1 | length 13.1
  Bottom Layer w0.279: P6.22@-18.102,-18.624 -18.714,-18.624 -19.05,-18.288 -19.05,-17.272 -18.542,-16.764 -13.462,-16.764 -13.062,-17.164 R26.1@-10.642,-17.164 R26.1@-10.627,-17.179
  Bottom Layer w0.381: Q12.S@-10.627,-19.349 R26.1@-10.627,-17.179
SCLK: P6.12 U4.31 U5.8 | length 126
  Top Layer w0.152: v1(-22.606,-24.892) v1(-22.606,-23.368) ; v1(-16.129,-34.671) v1(-16.129,-32.385) ; v1(-5.08,-0.381) -2.109,-0.381 -0.584,1.144 -0.584,6.274 9.398,16.256 v1(9.652,16.256)
  Bottom Layer w0.152: v1(-22.606,-24.892) -22.86,-25.146 -22.86,-33.528 -21.717,-34.671 v1(-16.129,-34.671) ; P6.12@-18.102,-23.624 -22.35,-23.624 v1(-22.606,-23.368) -22.911,-23.063 -22.911,-14.161 -20.129,-11.379 -17.529,-11.379 -7.877,-1.727 -7.315,-1.727 -5.969,-0.381 v1(-5.08,-0.381) ; v1(-16.129,-32.385) -12.192,-32.385 -11.557,-31.75 -7.366,-31.75 -4.572,-34.544 8.382,-34.544 10.262,-32.664 10.262,-28.196 10.236,-28.171 10.236,-24.054 10.668,-23.622 13.716,-23.622 14.052,-23.958 U5.8@14.052,-24.944 ; v1(9.652,16.256) 9.652,17.428 U4.31@10.096,17.872
SD_NCD: D3.K P1.9 Q3.S | length 27.7
  Bottom Layer w0.152: P1.9@9.327,-65.707 10.62,-65.707 12.7,-63.627 17.018,-63.627 19.685,-60.96 21.209,-60.96 22.733,-59.436 22.733,-58.293 22.225,-57.785 22.225,-54.462 D3.K@22.995,-53.692 22.225,-52.922 22.225,-51.562 22.352,-51.435 23.368,-51.435 23.622,-51.181 23.622,-50.089 Q3.S@23.395,-49.862
TSCL: P6.19
TSDA: P6.18
VCOM: C33.2 P6.1 | length 3.2
  Bottom Layer w0.279: P6.1@-18.102,-29.124 -17.104,-29.124 -16.256,-29.972 -15.342,-29.972 C33.2@-15.292,-30.022
VDD: C37.2 P6.7 | length 3.3
  Bottom Layer w0.279: P6.7@-18.102,-26.124 -16.726,-26.124 -15.748,-25.146 -15.496,-25.146 C37.2@-15.292,-24.942
VGH: C39.2 P6.20 | length 3
  Bottom Layer w0.279: P6.20@-18.102,-19.624 -15.936,-19.624 -15.444,-20.116 C39.2@-15.292,-20.116
VGL: C40.2 P6.21 | length 2.8
  Bottom Layer w0.279: P6.21@-18.102,-19.124 -15.316,-19.124 C40.2@-15.292,-19.1
VPP: C36.2 P6.6 | length 3.1
  Bottom Layer w0.279: P6.6@-18.102,-26.624 -17.539,-26.624 -17.471,-26.692 -16.532,-26.692 -15.798,-25.958 C36.2@-15.292,-25.958
VSH: C35.2 P6.5 | length 2.9
  Bottom Layer w0.279: P6.5@-18.102,-27.124 -15.442,-27.124 C35.2@-15.292,-26.974
VSL: C34.2 P6.3 | length 3
  Bottom Layer w0.279: P6.3@-18.102,-28.124 -15.556,-28.124 C34.2@-15.232,-28.448
VUSB: C1.2 C2.1 P2.1 U1.4 U2.1 U2.3 | length 26.4
  Top Layer w0.305: C2.1@3.448,-65.745 3.877,-66.174 U2.3@5.042,-66.174 ; v1(4.953,-67.945) 4.953,-66.263 U2.3@5.042,-66.174 ; U2.1@5.042,-64.274 5.157,-64.389 5.969,-64.389 6.223,-64.643 6.223,-65.913 5.962,-66.174 U2.3@5.042,-66.174
  Top Layer w0.381: U1.4@-7.309,-62.164 C1.2@-4.366,-62.164 ; C1.2@-3.937,-61.735 -3.569,-62.103 1.905,-62.103 2.413,-62.611 2.413,-65.024 2.794,-65.405 3.108,-65.405 C2.1@3.448,-65.745
  Bottom Layer w0.305: P2.1@1.3,-71.493 1.3,-70.836 2.54,-69.596 3.302,-69.596 v1(4.953,-67.945)
pads on no net: P2.4 P3.2 P3.5 P3.6 P6.M U2.4 U4.17 U4.18 U4.19 U4.20 U4.21 U4.22 U4.32 U5.15 U6.6 U6.7 U6.8 U6.9 U6.10 U6.11 U6.19 U6.20 U6.22 U6.23 U6.26 U6.27 U6.28 U6.29 U6.30 U6.31 U6.36 U6.37 U7.2 U7.3 U7.4 U7.5 U7.6 U7.7 U7.14 U7.15 U7.16 U7.17 U7.19 U7.21 U8.5 U8.7 U8.8 U8.9 U8.10 U8.17 U8.18 U8.19 U9.7 U9.11 U10.6 U11.2 U11.3 U11.6 U11.7 U11.20 U11.23 U11.24 U11.28 U11.30 U12.4 U14.1 U15.3

## Polygon pours and split planes (outlines as drawn)
GND on Signal Layer 2 "GND_L03_P000" (solid, remove dead copper, pour order 0): -31.75,22.86 31.75,22.86 31.75,-78.74 -31.75,-78.74
+3V3 on Signal Layer 1 "+3V3_L02_P002" (solid, remove dead copper, pour order 2): -35.56,25.4 38.1,25.4 38.1,-78.74 -35.56,-78.74
GND on Bottom Layer "GND_L04_P004" (solid, remove dead copper, pour order 4): -30.48,20.32 27.94,20.32 27.94,-78.74 -30.48,-78.74
GND on Top Layer "GND_L01_P006" (solid, remove dead copper, pour order 6): -27.94,20.32 30.48,20.32 30.48,-78.74 -27.94,-78.74

## Keep-outs
Keep-Out Layer:
  the board outline again, w0.025

## Silkscreen, mask and mechanical layers (free items; w line width, h text height)
Top Overlay:
  lines w0.203: -13.8,-38.074 -13.8,-8.674 ; 0,-38.074 0,-8.674 ; 13.8,-38.074 13.8,-8.674 ; -21.692,-38.074 15.9,-38.074 15.9,-8.674 -21.692,-8.674 -21.692,-38.074
  text "OpenIMU" at -7.62,-50.8 h3
  text ".Print_Date" at -4.445,-55.245 h1.52
Bottom Overlay:
  lines w0.152: -20.32,4.985 21.68,4.985 ; -20.32,7.525 -20.32,-57.475 21.68,-57.475 21.68,7.525 ; -20.32,-66.675 21.68,-66.675 21.68,-1.675 -20.32,-1.675 -20.32,-66.675
  lines w0.178: -16.256,-30.988 cw(c-16.256,-30.226) -17.018,-30.226 -17.018,-27.94 cw(c-16.002,-27.94) -16.002,-26.924 ; -16.256,-8.636 cw(c-16.256,-8.89) -16.002,-8.89 -16.002,-12.954 cw(c-16.256,-12.954) -16.256,-13.208 ccw(c-16.256,-13.462) -16.51,-13.462 -16.51,-23.368 ccw(c-16.002,-23.368) -16.002,-23.876 ; -15.24,-17.526 -15.24,-9.144 cw(c-14.732,-9.144) -14.732,-8.636
  lines w0.254: -20.574,-57.15 cw(c-20.574,-57.912) -19.812,-57.912 -19.812,-58.166 ccw(c-18.542,-58.166) -18.542,-59.436

## Text inside footprints (layer, text, board x,y; h text height)
D2: Top Overlay "K" at -2.6,-5.834 h1.02
P6: Bottom Overlay "1" at -18.177,-30.024 h0.7 r270
U4: Bottom Overlay "Antenna" at 22.716,4.572 h2.03 r270